# Altium PCB main.PcbDoc (part 12 of 16)
Units mil, origin at the board's own origin, x right, y up, seen from the top; angles counter-clockwise.
Board outline 8394.75 x 5164.44 mil, 7 copper layers (Top Layer 1, Layer 2, Layer 3, Unused, Layer 4_pow, Layer 5_gnd, Bottom 6+gnd), stack 64.043 mil thick; 364 components, 409 nets, 1932 pads, 1061 vias.
Unrouted connection lines stored in the file: 2.
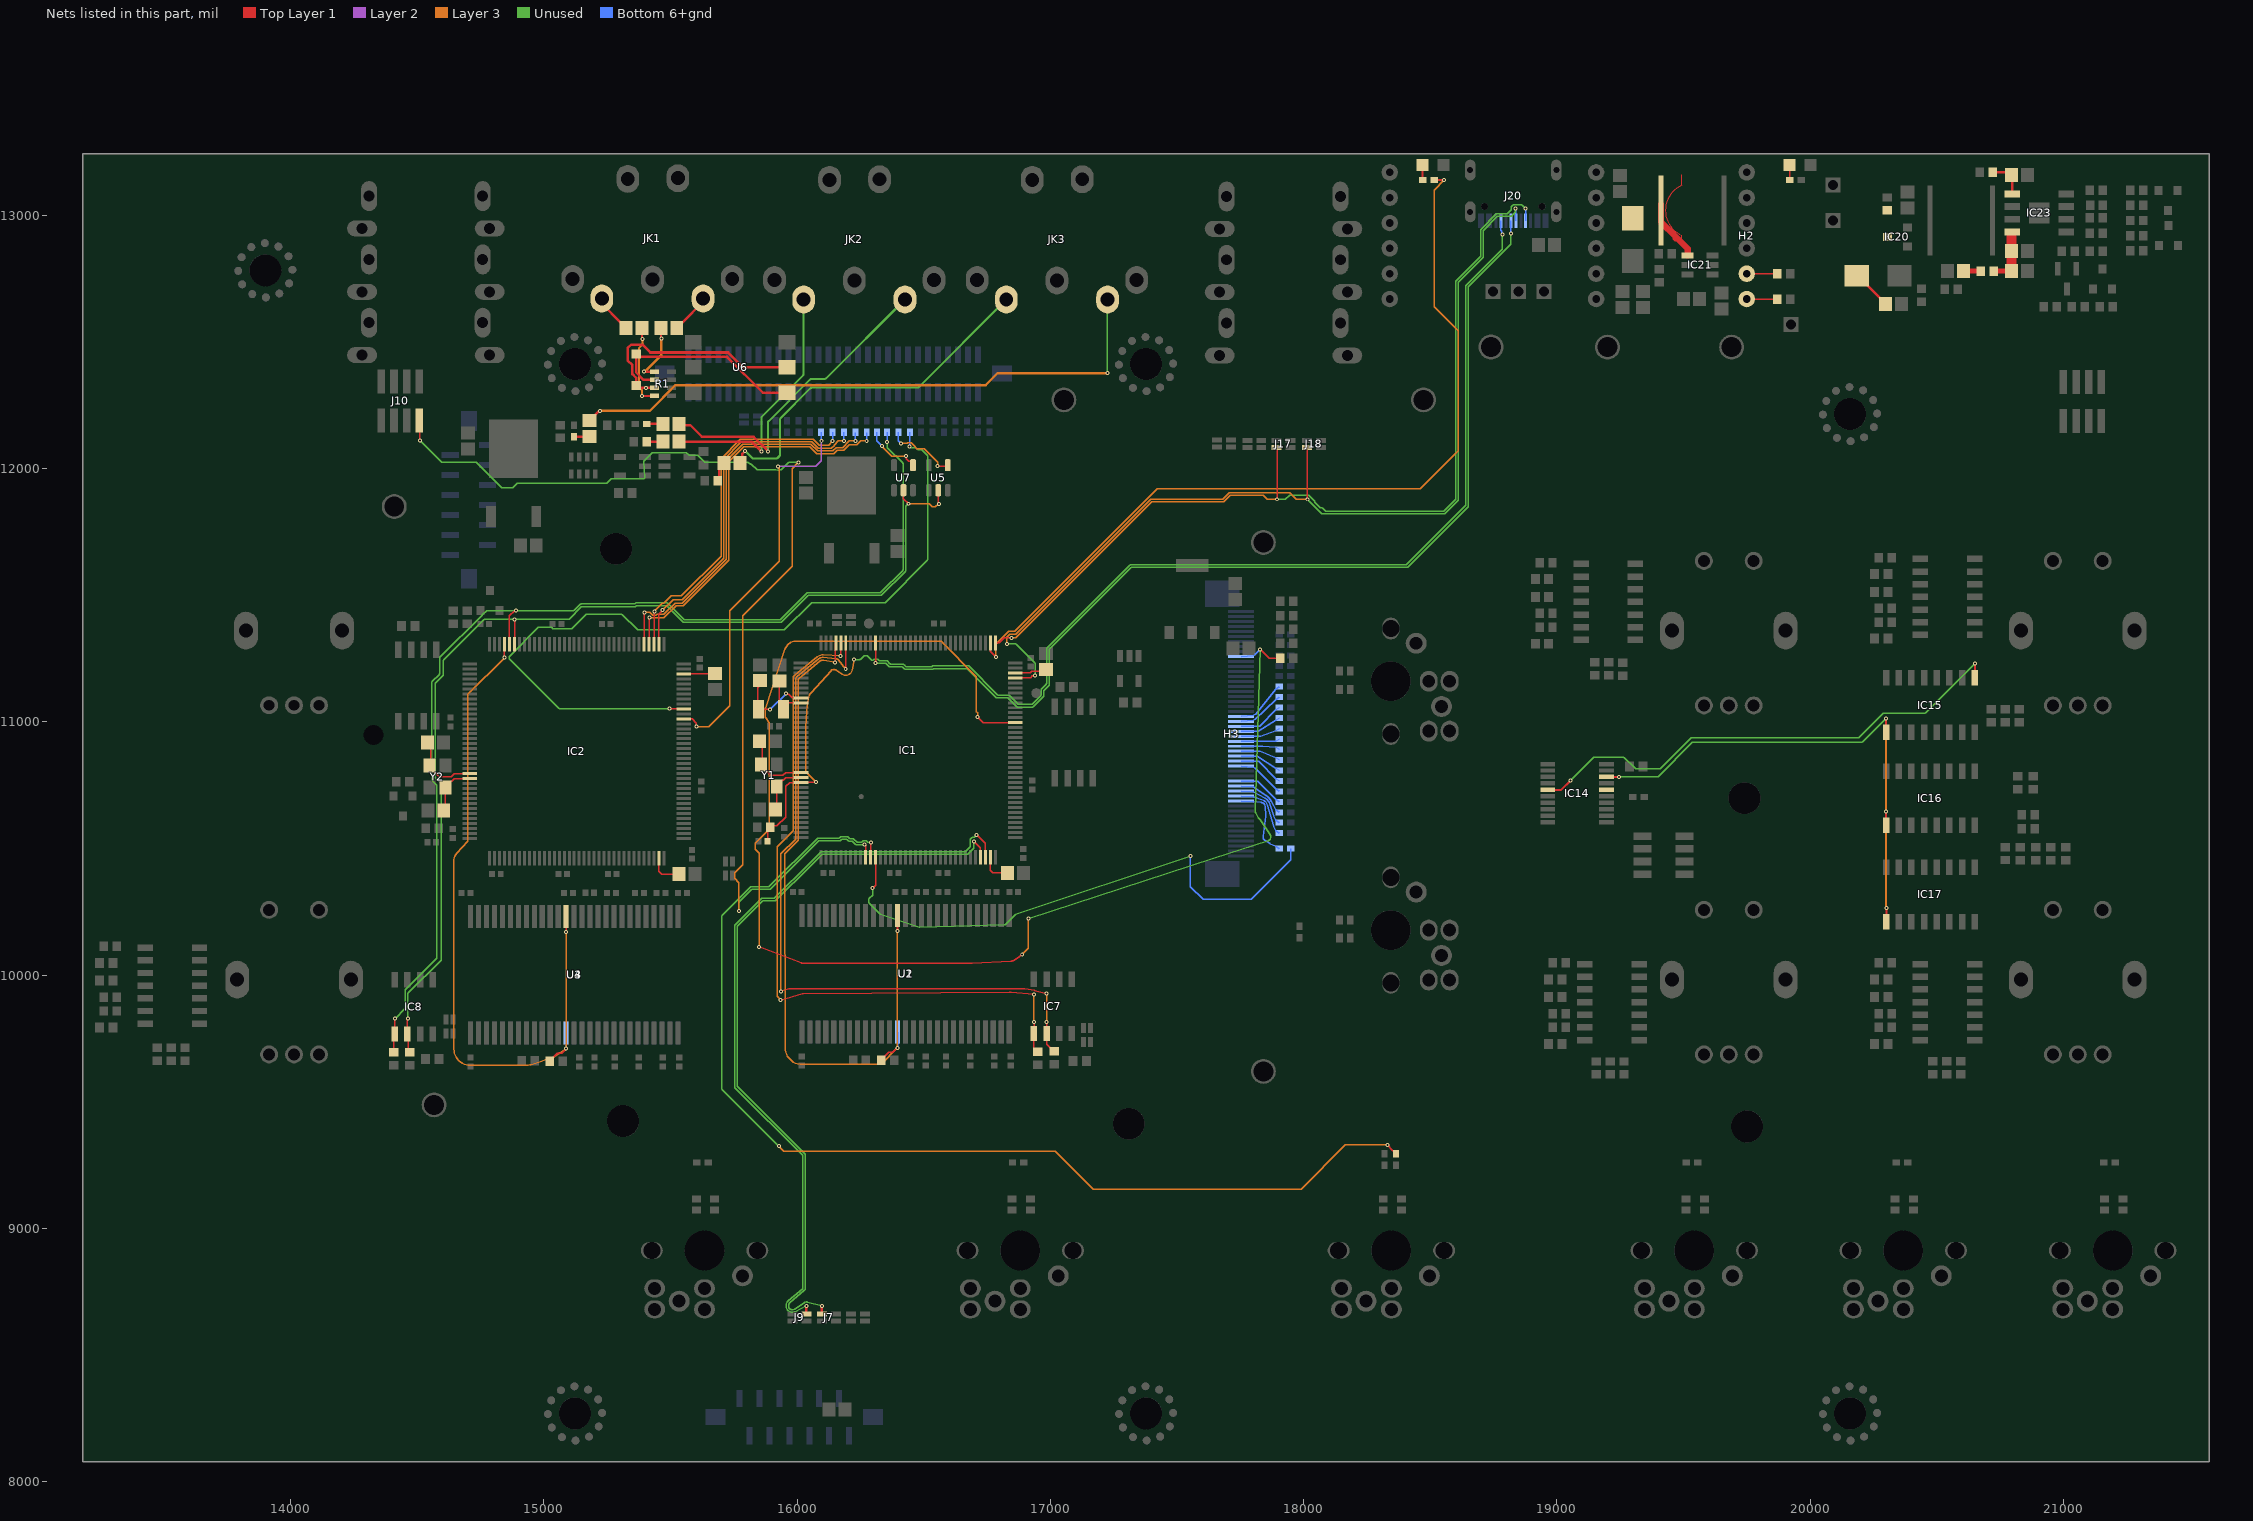
[diagram p15: the nets of this part, all layers, seen from the top]

## Via types
v1: diameter 15.75, hole 7.87, Top Layer 1 to Bottom 6+gnd, tented both sides, 961 vias
v2: diameter 27.56, hole 11.81, Top Layer 1 to Bottom 6+gnd, 45 vias
v3: diameter 23.62/23.62/23.62/23.62/23.62/23.62/23.62 (per signal layer), hole 12, Top Layer 1 to Bottom 6+gnd, tented top, 42 vias
v4: diameter 15.75, hole 7.87, Top Layer 1 to Bottom 6+gnd, 10 vias
v5: diameter 23.62/23.62/23.62/23.62/23.62/23.62/23.62 (per signal layer), hole 12, Top Layer 1 to Bottom 6+gnd, tented bottom, 3 vias

## Nets (pads, with @x,y where several pads share a name; then routed paths per layer and width w, separated by ;. In a path a pad name is that pad's centre, name@x,y a point inside that pad or via, vN(x,y) a via of type N, cw(c..) or ccw(c..) an arc to the next point about the centre after c; other vN are vias at no path point) (continued)
GPIO_GUI.LED2_1: IC1.46 J10.2 | length 4369.6
  Top Layer 1 w5: J10.2@14508.32,12190.6 14510.75,12188.17 v1(14510.75,12112.06) ; v1(16266.92,10515.28) 16266.92,10514.31 16270.83,10510.4 IC1.46@16270.83,10466.06
  Unused w5: v1@14512.72,12108.02 ccw(c14507.72,12108.02) 14511.25,12111.55 v1(14510.75,12112.06) 14597.81,12025 14732.84,12025 14833.21,11924.63 14876.37,11924.63 14895.22,11943.48 15249.32,11943.48 15266.83,11960.99 15393.45,11960.99 ccw(c15394.2,11965.94) 15399.18,11966.32 15394.47,12027.36 cw(c15399.45,12027.76) 15395.9,12031.28 15425.86,12061.24 cw(c15429.38,12057.69) 15429.38,12062.69 15561.14,12062.69 cw(c15561.14,12057.69) 15564.67,12061.23 15571.76,12054.14 ccw(c15575.28,12057.69) 15575.28,12052.69 15606.2,12052.69 cw(c15606.2,12047.69) 15609.72,12051.24 15634.51,12026.45 ccw(c15638.03,12030) 15638.06,12025 15802.85,12025 cw(c15802.85,12020) 15804.96,12024.53 15813.72,12020.44 cw(c15811.6,12015.91) 15814.33,12020.1 15817.89,12017.77 cw(c15815.16,12013.59) 15818.37,12017.41 15843.6,11996.18 ccw(c15846.83,12000) 15846.8,11995 15915.39,11995 cw(c15915.39,11990) 15915.84,11994.98 15923.23,11994.32 ccw(c15924.63,12009.63) 15925.93,11994.31 15934.31,11995.02 ccw(c15933.87,12000) 15935.7,11995.35 ccw(c15930,12009.63) 15939.37,11997.44 ccw(c15936.3,12001.39) 15939.81,11997.83 15965.54,12023.55 cw(c15969.06,12020) 15969.06,12025 v1(16005,12025) ; v1(15769.97,10252.68) cw(c15773.64,10256.08) 15768.64,10256.08 15768.64,10284.7 cw(c15773.64,10284.7) 15770.09,10288.22 15819.42,10337.55 cw(c15822.94,10334) 15822.94,10339 15890.81,10339 ccw(c15890.81,10344) 15894.33,10340.45 16083.37,10529.49 cw(c16086.89,10525.94) 16086.89,10530.94 16168.24,10530.94 ccw(c16168.24,10535.94) 16171.76,10532.39 16174.24,10534.87 cw(c16177.76,10531.31) 16177.76,10536.31 16194.64,10536.31 cw(c16194.64,10531.31) 16198.16,10534.87 16202.38,10530.65 ccw(c16205.88,10534.21) 16205.88,10529.21 16215.85,10529.21 cw(c16215.85,10524.21) 16219.32,10527.82 16222.44,10524.82 cw(c16211.79,10513.73) 16222.7,10524.57 16230.53,10516.73 ccw(c16234.06,10520.28) 16234.06,10515.28 v1(16266.92,10515.28)
  Layer 3 w5: v1(15769.97,10252.68) 15769.97,10365.55 15753.15,10382.37 15753.15,10405 15785,10436.85 15785,11419.29 15980,11614.29 15980,12000 v1(16005,12025)
GPIO_GUI.LED3_1: IC1.47 R3.2 | length 4384.8
  Top Layer 1 w5: IC1.47@16290.51,10466.06 16290.51,10523.36 v1(16291.15,10524) ; v1(18330.28,9330) 18352.74,9307.54 18355.69,9307.54 18365,9298.23 R3.2@18365,9295.28
  Unused w5: v1(15928.15,9325) 15704.6,9548.55 cw(c15708.15,9552.07) 15703.15,9552.07 15703.15,10233.36 cw(c15708.15,10233.36) 15704.6,10236.88 15815.27,10347.55 cw(c15818.79,10344) 15818.79,10349 15886.67,10349 ccw(c15886.67,10354) 15890.19,10350.45 16079.23,10539.49 cw(c16082.75,10535.94) 16082.75,10540.94 16164.1,10540.94 ccw(c16164.1,10545.94) 16167.62,10542.39 16170.1,10544.87 cw(c16173.62,10541.31) 16173.62,10546.31 16198.78,10546.31 cw(c16198.78,10541.31) 16202.3,10544.87 16206.52,10540.65 ccw(c16210.02,10544.21) 16210.02,10539.21 16220,10539.21 cw(c16220,10534.21) 16223.45,10537.82 16226.35,10535.05 cw(c16215.98,10524.21) 16226.54,10534.86 16234.68,10526.73 ccw(c16238.2,10530.28) 16238.2,10525.28 16253.11,10525.28 ccw(c16253.11,10530.28) 16256.63,10526.73 16259.11,10529.2 cw(c16262.63,10525.65) 16262.63,10530.65 16271.22,10530.65 cw(c16271.22,10525.65) 16274.74,10529.2 16278.23,10525.72 ccw(c16281.75,10529.27) 16281.61,10524.27 v1(16291.15,10524)
  Layer 3 w5: v1(15928.15,9325) 15948.15,9305 17020,9305 17170,9155 17990,9155 18165,9330 v1(18330.28,9330)
GUI_NRST: C7.2 IC1.25 J20.A5 R5.2 | length 5563.9
  Top Layer 1 w5: C7.2@15883.15,10528.82 15883.15,10573.23 R5.2@15893.74,10583.82 15900.07,10590.15 15920.21,10590.15 15954.78,10624.73 15954.78,10745.45 15970.2,10760.87 IC1.25@16015.39,10760.87 16016.06,10761.53 16074.57,10761.53 v1(16075.24,10762.2)
  Unused w5: v1(16225.01,11246.58) 16247.26,11246.58 ccw(c16247.26,11251.58) 16250.78,11248.03 16262.75,11260 cw(c16266.27,11256.44) 16266.27,11261.44 16274.69,11261.44 cw(c16274.69,11256.44) 16278.12,11260.08 16281.12,11257.25 cw(c16270.57,11246.07) 16281.4,11256.98 16293.4,11244.98 ccw(c16296.93,11248.52) 16296.93,11243.52 16297.74,11243.52 ccw(c16297.74,11248.52) 16301.26,11244.97 16302.42,11246.13 cw(c16305.94,11242.58) 16305.94,11247.58 16316.75,11247.58 cw(c16316.75,11242.58) 16320.27,11246.13 16322.73,11243.67 ccw(c16326.25,11247.22) 16326.25,11242.22 16352.68,11242.22 cw(c16352.68,11237.22) 16356.2,11240.77 16366.7,11230.27 ccw(c16370.22,11233.82) 16370.22,11228.82 16416.43,11228.82 cw(c16416.43,11223.82) 16419.93,11227.39 16424.17,11223.24 cw(c16413.67,11212.52) 16424.23,11223.18 16427.6,11219.81 ccw(c16431.13,11223.34) 16431.13,11218.34 16530.6,11218.34 ccw(c16530.6,11223.34) 16534.12,11219.79 16535.46,11221.13 cw(c16538.98,11217.58) 16538.98,11222.58 16673.53,11222.58 cw(c16673.53,11217.58) 16677.07,11221.12 16790.54,11107.64 ccw(c16794.05,11111.2) 16794.05,11106.2 16834.91,11106.2 cw(c16834.91,11101.2) 16838.43,11104.75 16872.73,11070.45 ccw(c16876.26,11074) 16876.26,11069 16925.19,11069 ccw(c16925.19,11074) 16928.71,11070.45 16962.48,11104.21 ccw(c16958.92,11107.73) 16963.92,11107.73 16963.92,11128.38 cw(c16968.92,11128.38) 16965.37,11131.9 16983.39,11149.92 ccw(c16979.84,11153.44) 16984.84,11153.44 16984.84,11287.91 cw(c16989.84,11287.91) 16986.29,11291.43 17313.42,11618.55 cw(c17316.94,11615) 17316.94,11620 18402.07,11620 ccw(c18402.07,11625) 18405.59,11621.45 18640,11855.86 18640,12723.14 18783.71,12866.85 ccw(c18780.16,12870.37) 18785.16,12870.37 v1(18785.16,12923.92)
  Layer 3 w5: v1(16075.24,10762.2) 16035.29,10802.15 ; v1(16225.01,11246.58) 16217.02,11204.34 cw(c16192.09,11209.06) 16177.74,11188.13 16154,11204.46 ; 16033.85,10805.66 ccw(c16038.85,10805.66) 16035.29,10802.15 ; 16033.85,10805.66 ccw(c16038.85,10805.66) 16035.29,10802.15 ; 16033.85,10805.66 ccw(c16038.85,10805.66) 16035.29,10802.15 ; 16033.85,10805.66 ccw(c16038.85,10805.66) 16035.29,10802.15 ; 16033.85,10805.66 ccw(c16038.85,10805.66) 16035.29,10802.15 ; 16033.85,10805.66 ccw(c16038.85,10805.66) 16035.29,10802.15 ; 16033.85,10805.66 ccw(c16038.85,10805.66) 16035.29,10802.15 ; 16033.85,10805.66 ccw(c16038.85,10805.66) 16035.29,10802.15 ; 16033.85,10805.66 ccw(c16038.85,10805.66) 16035.29,10802.15 ; 16033.85,10805.66 ccw(c16038.85,10805.66) 16035.29,10802.15 ; 16033.85,10805.66 ccw(c16038.85,10805.66) 16035.29,10802.15 ; 16033.85,10805.66 ccw(c16038.85,10805.66) 16035.29,10802.15 ; 16033.85,10805.66 ccw(c16038.85,10805.66) 16035.29,10802.15 ; 16033.85,10805.66 ccw(c16038.85,10805.66) 16035.29,10802.15 ; 16033.85,10805.66 ccw(c16038.85,10805.66) 16035.29,10802.15 ; 16033.85,10805.66 ccw(c16038.85,10805.66) 16035.29,10802.15 ; 16033.85,10805.66 16033.83,10978.64 cw(c16079.21,10978.64) 16033.94,10981.78 16038.1,11041.91 ; 16038.1,11041.91 cw(c16093.35,11038.08) 16038.39,11044.84 ; 16038.1,11041.91 cw(c16093.35,11038.08) 16038.39,11044.84 ; 16038.1,11041.91 cw(c16093.35,11038.08) 16038.39,11044.84 ; 16038.1,11041.91 cw(c16093.35,11038.08) 16038.39,11044.84 ; 16038.1,11041.91 cw(c16093.35,11038.08) 16038.39,11044.84 ; 16038.1,11041.91 cw(c16093.35,11038.08) 16038.39,11044.84 ; 16038.1,11041.91 cw(c16093.35,11038.08) 16038.39,11044.84 ; 16038.1,11041.91 cw(c16093.35,11038.08) 16038.39,11044.84 ; 16038.1,11041.91 cw(c16093.35,11038.08) 16038.39,11044.84 ; 16038.1,11041.91 cw(c16093.35,11038.08) 16038.39,11044.84 ; 16038.1,11041.91 cw(c16093.35,11038.08) 16038.39,11044.84 ; 16038.1,11041.91 cw(c16093.35,11038.08) 16038.39,11044.84 ; 16038.1,11041.91 cw(c16093.35,11038.08) 16038.39,11044.84 ; 16038.1,11041.91 cw(c16093.35,11038.08) 16038.39,11044.84 ; 16038.1,11041.91 cw(c16093.35,11038.08) 16038.39,11044.84 ; 16038.1,11041.91 cw(c16093.35,11038.08) 16038.39,11044.84 ; 16038.39,11044.84 16044.13,11091.28 cw(c16089.16,11085.73) 16055.62,11116.29 16133.87,11202.18 ; 16133.87,11202.18 cw(c16145.24,11191.83) 16154,11204.46 ; 16133.87,11202.18 cw(c16145.24,11191.83) 16154,11204.46 ; 16133.87,11202.18 cw(c16145.24,11191.83) 16154,11204.46 ; 16133.87,11202.18 cw(c16145.24,11191.83) 16154,11204.46 ; 16133.87,11202.18 cw(c16145.24,11191.83) 16154,11204.46 ; 16133.87,11202.18 cw(c16145.24,11191.83) 16154,11204.46 ; 16133.87,11202.18 cw(c16145.24,11191.83) 16154,11204.46 ; 16133.87,11202.18 cw(c16145.24,11191.83) 16154,11204.46 ; 16133.87,11202.18 cw(c16145.24,11191.83) 16154,11204.46 ; 16133.87,11202.18 cw(c16145.24,11191.83) 16154,11204.46 ; 16133.87,11202.18 cw(c16145.24,11191.83) 16154,11204.46 ; 16133.87,11202.18 cw(c16145.24,11191.83) 16154,11204.46 ; 16133.87,11202.18 cw(c16145.24,11191.83) 16154,11204.46 ; 16133.87,11202.18 cw(c16145.24,11191.83) 16154,11204.46 ; 16133.87,11202.18 cw(c16145.24,11191.83) 16154,11204.46 ; 16133.87,11202.18 cw(c16145.24,11191.83) 16154,11204.46
  Bottom 6+gnd w5: J20.A5@18778.6,12978.4 18778.6,12941.8 18783.11,12937.29 18783.11,12925.98 v1(18785.16,12923.92)
GUI_SWD.CLK_1: IC1.109 J17.1 J20.A8 | length 3708.1
  Top Layer 1 w5: IC1.109@16782.64,11311.57 16783.27,11312.2 16798.85,11312.2 16818.55,11331.91 v1(16846.8,11331.91) ; J17.1@17892.56,12083.86 17895,12081.42 v1(17895,11879.38)
  Unused w5: v1(17895,11879.38) 17926.31,11879.38 ccw(c17926.31,11884.38) 17929.82,11880.83 17942.3,11893.31 cw(c17945.82,11889.76) 17945.82,11894.76 18019.3,11894.76 cw(c18019.3,11889.76) 18022.82,11893.31 18042.37,11873.75 cw(c18038.82,11870.23) 18043.82,11870.23 18043.82,11869.53 ccw(c18048.82,11869.53) 18045.27,11866.01 18064.83,11846.45 ccw(c18068.35,11850) 18068.35,11845 18072.8,11845 cw(c18072.8,11840) 18076.32,11843.56 18087.29,11832.71 ccw(c18090.81,11836.26) 18090.81,11831.26 18549.24,11831.26 ccw(c18549.24,11836.26) 18552.76,11832.71 18600,11879.94 18600,12739.71 18697.94,12837.65 ccw(c18694.39,12841.17) 18699.39,12841.17 18699.39,12942.67 cw(c18704.39,12942.67) 18700.84,12946.19 18760.53,13005.88 cw(c18764.05,13002.33) 18764.05,13007.33 18803.19,13007.33 ccw(c18803.19,13012.33) 18806.71,13008.78 18817.73,13019.8 ccw(c18814.18,13023.32) 18819.18,13023.32 18819.18,13031.19 cw(c18824.18,13031.19) 18820.63,13034.71 18826.6,13040.68 cw(c18830.12,13037.13) 18830.12,13042.13 18859.14,13042.13 cw(c18859.14,13037.13) 18862.68,13040.66 v1(18876.59,13026.75)
  Layer 3 w5: v1(16846.8,11331.91) 16862.51,11331.91 17400.23,11869.63 17685.51,11869.63 17711.26,11895.37 17840.87,11895.37 17856.86,11879.38 v1(17895,11879.38)
  Bottom 6+gnd w5: J20.A8@18877.02,12978.4 v1@18877.02,13026.32
GUI_SWD.IO_1: IC1.105 J18.1 J20.A7 | length 3904.6
  Top Layer 1 w5: IC1.105@16860.91,11174.25 16861.02,11174.37 16921.6,11174.37 16929.31,11182.08 16937.5,11182.08 v1(16939.55,11184.13) ; J18.1@18012.56,12083.86 18015,12081.42 v1(18015,11879.38)
  Unused w5: v1(16828.52,11308.31) 16862.06,11308.31 cw(c16862.06,11303.31) 16865.58,11306.86 16938.11,11234.34 cw(c16934.55,11230.82) 16939.55,11230.82 v1(16939.55,11184.13) ; v1(18015,11879.38) 18071.67,11822.71 ccw(c18075.19,11826.26) 18075.19,11821.26 18553.39,11821.26 ccw(c18553.39,11826.26) 18556.91,11822.71 18610,11875.8 18610,12735.57 18707.94,12833.51 ccw(c18704.39,12837.03) 18709.39,12837.03 18709.39,12938.53 cw(c18714.39,12938.53) 18710.84,12942.05 18764.67,12995.88 cw(c18768.19,12992.33) 18768.19,12997.33 18818.55,12997.33 ccw(c18818.55,13002.33) 18822.07,12998.78 18835.16,13011.87 18835.16,13024.7 v1(18837.22,13026.75)
  Layer 3 w5: v1(16828.52,11308.31) 16828.44,11308.39 16828.44,11335.29 16840.43,11347.28 16863.74,11347.28 17396.08,11879.63 17681.37,11879.63 17707.12,11905.37 17945.87,11905.37 17971.86,11879.38 v1(18015,11879.38)
  Bottom 6+gnd w5: J20.A7@18837.65,12978.4 v1@18837.65,13026.32
GUI_SWD.SWO_1: IC1.133 J20.A6 | length 4111.2
  Top Layer 1 w5: v1(16310.24,11232.2) IC1.133@16310.2,11311.57
  Unused w5: v1(16310.24,11232.2) 16348.41,11232.2 cw(c16348.41,11227.2) 16351.93,11230.76 16363.85,11218.97 ccw(c16367.38,11222.52) 16367.38,11217.52 16413.59,11217.52 cw(c16413.59,11212.52) 16417.1,11216.08 16423.49,11209.77 ccw(c16426.99,11213.34) 16426.99,11208.34 16535.6,11208.34 ccw(c16535.6,11213.34) 16538.98,11209.66 16539.14,11209.8 cw(c16542.52,11206.12) 16542.52,11211.12 16668.78,11211.12 cw(c16668.78,11206.12) 16672.32,11209.65 16785.79,11096.18 ccw(c16789.3,11099.74) 16789.3,11094.74 16830.16,11094.74 cw(c16830.16,11089.74) 16833.68,11093.29 16866.52,11060.45 ccw(c16870.04,11064) 16870.04,11059 16929.33,11059 ccw(c16929.33,11064) 16932.85,11060.45 16972.48,11100.07 ccw(c16968.92,11103.59) 16973.92,11103.59 16973.92,11122.17 cw(c16978.92,11122.17) 16975.37,11125.69 16994.86,11145.17 ccw(c16991.31,11148.69) 16996.31,11148.69 16996.31,11285.23 cw(c17001.31,11285.23) 16997.76,11288.75 17317.56,11608.55 cw(c17321.08,11605) 17321.08,11610 18408.28,11610 ccw(c18408.28,11615) 18411.8,11611.45 18650,11849.64 18650,12719 18816.95,12885.95 ccw(c18813.4,12889.47) 18818.4,12889.47 v1(18818.4,12928.05)
  Bottom 6+gnd w5: J20.A6@18817.97,12978.4 18818.18,12978.19 18818.18,12928.27 v1(18818.4,12928.05)
I2C1_SCL: IC2.139 IC8.6 R15.1 U5.2 U7.2 | length 4269.9
  Top Layer 1 w5: v1(14463.15,9828.82) 14461.48,9827.15 IC8.6@14461.48,9768.49 14465.24,9764.73 14465.24,9701.51 R15.1@14471.48,9695.26 ; IC2.139@14883.85,11307.38 14885,11308.54 v1(14885,11405) ; U7.2@16420,11915 16420,11881.64 v1(16440,11861.64) ; U5.2@16557.4,11915 16557.4,11865.51 16560,11862.91 v1(16560,11860)
  Unused w5: v1(14463.15,9828.82) 14463.15,9926.75 cw(c14468.15,9926.75) 14464.6,9930.27 14594.38,10060.05 ccw(c14590.83,10063.57) 14595.83,10063.57 14595.83,10754.07 ccw(c14590.83,10754.07) 14594.36,10757.61 14572.09,10779.88 cw(c14575.65,10783.39) 14570.65,10783.39 14570.65,11149.25 cw(c14575.65,11149.25) 14572.1,11152.77 14601.7,11182.37 ccw(c14598.15,11185.89) 14603.15,11185.89 14603.15,11241.75 cw(c14608.15,11241.75) 14604.6,11245.27 14762.88,11403.55 cw(c14766.4,11400) 14766.4,11405 15096.08,11405 ccw(c15096.08,11410) 15099.6,11406.45 15147.56,11454.41 cw(c15151.08,11450.86) 15151.08,11455.86 15361.08,11455.86 ccw(c15361.08,11460.86) 15364.6,11457.31 15365.48,11458.19 cw(c15369,11454.64) 15369,11459.64 15481.44,11459.64 cw(c15481.44,11454.64) 15484.96,11458.19 15547.88,11395.27 ccw(c15551.4,11398.82) 15551.4,11393.82 15935.76,11393.82 ccw(c15935.76,11398.82) 15939.28,11395.27 16042.56,11498.55 cw(c16046.08,11495) 16046.08,11500 16331.36,11500 ccw(c16331.36,11505) 16334.88,11501.45 16426.91,11593.47 ccw(c16423.36,11596.99) 16428.36,11596.99 16428.36,11847.93 cw(c16433.36,11847.93) 16429.81,11851.45 v1(16440,11861.64)
  Layer 3 w5: v1(16440,11861.64) 16521.62,11861.64 16533.63,11849.63 16546.37,11849.63 16556.74,11860 v1(16560,11860)
I2C1_SCL1_9: R149.1 U5.4 | length 284.3
  Top Layer 1 w5: v1(16555,12010) 16590.98,12010 U5.4@16594.8,12013.82
  Layer 3 w5: v1(16410,12100) 16435.58,12100 16437.76,12102.17 16450.49,12102.17 16461.71,12090.96 16461.71,12090.41 16472.92,12079.19 16502.27,12079.19 16555,12026.46 v1(16555,12010)
  Bottom 6+gnd w5: R149.1@16400,12144.72 16400,12110 v1(16410,12100)
I2C1_SCL2_9: R151.1 U7.4 | length 227.9
  Top Layer 1 w5: v1(16430,12050) 16431.48,12048.52 16431.48,12039.74 16441.22,12030 16448.54,12030 16457.4,12021.14 U7.4@16457.4,12013.82
  Layer 3 w5: v1(16334.4,12089.55) 16373.95,12050 v1(16430,12050)
  Bottom 6+gnd w5: R151.1@16315,12144.72 16315,12110 16334.4,12090.6 v1(16334.4,12089.55) v1@16335,12088.95
I2C1_SCL_6: IC1.139 IC7.6 R13.1 | length 3306
  Top Layer 1 w5: v1(15936.32,9936.49) 15967.09,9946.7 ; v1(16192.09,11209.05) IC1.139@16192.09,11311.57 ; v1(16985.24,9927.2) 16939.07,9939.52 ; v1(16985.28,9815.69) 16985.28,9770.48 IC7.6@16985.24,9770.43 16985.24,9727.64 17013.27,9699.61 R13.1@17015.24,9699.61 ; 15967.09,9946.7 cw(c15970.24,9937.2) 15970.24,9947.2 ; 15967.09,9946.7 cw(c15970.24,9937.2) 15970.24,9947.2 ; 15967.09,9946.7 cw(c15970.24,9937.2) 15970.24,9947.2 ; 15967.09,9946.7 cw(c15970.24,9937.2) 15970.24,9947.2 ; 15967.09,9946.7 cw(c15970.24,9937.2) 15970.24,9947.2 ; 15967.09,9946.7 cw(c15970.24,9937.2) 15970.24,9947.2 ; 15967.09,9946.7 cw(c15970.24,9937.2) 15970.24,9947.2 ; 15967.09,9946.7 cw(c15970.24,9937.2) 15970.24,9947.2 ; 15967.09,9946.7 cw(c15970.24,9937.2) 15970.24,9947.2 ; 15967.09,9946.7 cw(c15970.24,9937.2) 15970.24,9947.2 ; 15967.09,9946.7 cw(c15970.24,9937.2) 15970.24,9947.2 ; 15967.09,9946.7 cw(c15970.24,9937.2) 15970.24,9947.2 ; 15967.09,9946.7 cw(c15970.24,9937.2) 15970.24,9947.2 ; 15967.09,9946.7 cw(c15970.24,9937.2) 15970.24,9947.2 ; 15967.09,9946.7 cw(c15970.24,9937.2) 15970.24,9947.2 ; 15967.09,9946.7 cw(c15970.24,9937.2) 15970.24,9947.2 ; 15970.24,9947.2 16897.96,9947.2 ; 16897.96,9947.2 cw(c16897.96,9937.2) 16899.83,9947.03 ; 16897.96,9947.2 cw(c16897.96,9937.2) 16899.83,9947.03 ; 16897.96,9947.2 cw(c16897.96,9937.2) 16899.83,9947.03 ; 16897.96,9947.2 cw(c16897.96,9937.2) 16899.83,9947.03 ; 16897.96,9947.2 cw(c16897.96,9937.2) 16899.83,9947.03 ; 16897.96,9947.2 cw(c16897.96,9937.2) 16899.83,9947.03 ; 16897.96,9947.2 cw(c16897.96,9937.2) 16899.83,9947.03 ; 16897.96,9947.2 cw(c16897.96,9937.2) 16899.83,9947.03 ; 16897.96,9947.2 cw(c16897.96,9937.2) 16899.83,9947.03 ; 16897.96,9947.2 cw(c16897.96,9937.2) 16899.83,9947.03 ; 16897.96,9947.2 cw(c16897.96,9937.2) 16899.83,9947.03 ; 16897.96,9947.2 cw(c16897.96,9937.2) 16899.83,9947.03 ; 16897.96,9947.2 cw(c16897.96,9937.2) 16899.83,9947.03 ; 16897.96,9947.2 cw(c16897.96,9937.2) 16899.83,9947.03 ; 16897.96,9947.2 cw(c16897.96,9937.2) 16899.83,9947.03 ; 16897.96,9947.2 cw(c16897.96,9937.2) 16899.83,9947.03 ; 16899.83,9947.03 16937.98,9939.77 ; 16937.98,9939.77 cw(c16935.11,9924.67) 16939.07,9939.52 ; 16937.98,9939.77 cw(c16935.11,9924.67) 16939.07,9939.52 ; 16937.98,9939.77 cw(c16935.11,9924.67) 16939.07,9939.52 ; 16937.98,9939.77 cw(c16935.11,9924.67) 16939.07,9939.52 ; 16937.98,9939.77 cw(c16935.11,9924.67) 16939.07,9939.52 ; 16937.98,9939.77 cw(c16935.11,9924.67) 16939.07,9939.52 ; 16937.98,9939.77 cw(c16935.11,9924.67) 16939.07,9939.52 ; 16937.98,9939.77 cw(c16935.11,9924.67) 16939.07,9939.52 ; 16937.98,9939.77 cw(c16935.11,9924.67) 16939.07,9939.52 ; 16937.98,9939.77 cw(c16935.11,9924.67) 16939.07,9939.52 ; 16937.98,9939.77 cw(c16935.11,9924.67) 16939.07,9939.52 ; 16937.98,9939.77 cw(c16935.11,9924.67) 16939.07,9939.52 ; 16937.98,9939.77 cw(c16935.11,9924.67) 16939.07,9939.52 ; 16937.98,9939.77 cw(c16935.11,9924.67) 16939.07,9939.52 ; 16937.98,9939.77 cw(c16935.11,9924.67) 16939.07,9939.52 ; 16937.98,9939.77 cw(c16935.11,9924.67) 16939.07,9939.52
  Layer 3 w5: v1(15936.32,9936.49) 15936.32,10479.8 15993.83,10537.31 15993.83,11170.85 ; v1(16192.09,11209.05) 16162.25,11244.93 ccw(c16150.43,11235.1) 16151.76,11250.41 16103.59,11254.6 ; v1(16985.28,9815.69) v1@16985.26,9927.18 ; 15993.83,11170.85 cw(c15998.83,11170.85) 15995.28,11174.37 15998.26,11177.35 cw(c16008.83,11166.71) 15999.33,11178.32 16085.28,11248.93 ; 15993.83,11170.85 cw(c15998.83,11170.85) 15995.27,11174.36 ; 15993.83,11170.85 cw(c15998.83,11170.85) 15995.27,11174.36 ; 15993.83,11170.85 cw(c15998.83,11170.85) 15995.27,11174.36 ; 15993.83,11170.85 cw(c15998.83,11170.85) 15995.27,11174.36 ; 16085.28,11248.93 cw(c16101.39,11229.33) 16103.59,11254.61 ; 16085.28,11248.93 cw(c16101.39,11229.33) 16103.59,11254.61 ; 16085.28,11248.93 cw(c16101.39,11229.33) 16103.59,11254.61 ; 16085.28,11248.93 cw(c16101.39,11229.33) 16103.59,11254.61 ; 16085.28,11248.93 cw(c16101.39,11229.33) 16103.59,11254.61 ; 16085.28,11248.93 cw(c16101.39,11229.33) 16103.59,11254.61 ; 16085.28,11248.93 cw(c16101.39,11229.33) 16103.59,11254.61 ; 16085.28,11248.93 cw(c16101.39,11229.33) 16103.59,11254.61 ; 16085.28,11248.93 cw(c16101.39,11229.33) 16103.59,11254.61 ; 16085.28,11248.93 cw(c16101.39,11229.33) 16103.59,11254.61 ; 16085.28,11248.93 cw(c16101.39,11229.33) 16103.59,11254.61 ; 16085.28,11248.93 cw(c16101.39,11229.33) 16103.59,11254.61 ; 16085.28,11248.93 cw(c16101.39,11229.33) 16103.59,11254.61 ; 16085.28,11248.93 cw(c16101.39,11229.33) 16103.59,11254.61 ; 16085.28,11248.93 cw(c16101.39,11229.33) 16103.59,11254.61 ; 16085.28,11248.93 cw(c16101.39,11229.33) 16103.59,11254.61
I2C1_SDA: IC2.140 IC8.5 R16.1 R150.1 | length 4391.9
  Top Layer 1 w5: R16.1@14406.48,9695.26 14406.48,9763.49 IC8.5@14411.48,9768.49 14411.48,9827.15 v1(14413.15,9828.82) ; IC2.140@14864.16,11307.38 14864.16,11419.83 14884.33,11440 v1(14890,11440)
  Unused w5: v1(14413.15,9828.82) 14451.7,9867.37 ccw(c14448.15,9870.89) 14453.15,9870.89 14453.15,9941.75 cw(c14458.15,9941.75) 14454.6,9945.27 14576.7,10067.37 ccw(c14573.15,10070.89) 14578.15,10070.89 14578.15,10746.75 ccw(c14573.15,10746.75) 14576.69,10750.28 14559.59,10767.38 cw(c14563.15,10770.89) 14558.15,10770.89 14558.15,11156.75 cw(c14563.15,11156.75) 14559.6,11160.27 14586.7,11187.37 ccw(c14583.15,11190.89) 14588.15,11190.83 14588.52,11223.64 ccw(c14573.15,11223.82) 14588.51,11224.56 14588.15,11231.87 cw(c14593.15,11232.08) 14588.15,11232.05 14588.15,11251.75 cw(c14593.15,11251.75) 14589.6,11255.27 14756.69,11422.35 cw(c14760.2,11418.8) 14756.86,11422.52 14775.11,11438.74 cw(c14778.43,11435) 14778.43,11440 15116.94,11440 ccw(c15116.94,11445) 15120.47,11441.46 15143.42,11464.41 cw(c15146.94,11460.86) 15146.94,11465.86 15356.94,11465.86 ccw(c15356.94,11470.86) 15360.46,11467.31 15361.7,11468.55 cw(c15365.22,11465) 15365.22,11470 15485.73,11470 cw(c15485.73,11465) 15489.25,11468.55 15552.53,11405.27 ccw(c15556.06,11408.82) 15556.06,11403.82 15931.61,11403.82 ccw(c15931.61,11408.82) 15935.13,11405.27 16038.78,11508.91 cw(c16042.3,11505.36) 16042.3,11510.36 16327.58,11510.36 ccw(c16327.58,11515.36) 16331.1,11511.81 16416.91,11597.62 ccw(c16413.36,11601.14) 16418.36,11601.14 16418.36,12019.57 ccw(c16413.36,12019.57) 16416.89,12023.11 16356.44,12083.56 cw(c16360,12087.07) 16355,12087.07 v1(16355,12105)
  Bottom 6+gnd w5: v1(16355,12105) R150.1@16355,12144.72
I2C1_SDA_6: IC1.140 IC7.5 R14.1 | length 3074
  Top Layer 1 w5: v1(15935.24,9902.2) 16020.97,9926.97 ; v1(16172,11260.7) 16172.2,11260.9 16172.2,11311.38 IC1.140@16172.4,11311.57 ; v1(16935.11,9924.67) 16846.41,9932.66 ; v1(16935.63,9815.65) 16935.63,9770.83 IC7.5@16935.24,9770.43 16935.24,9712.62 16949.47,9698.38 R14.1@16950.24,9698.38 ; 16020.97,9926.97 cw(c16025.24,9912.2) 16025.13,9927.58 ; 16020.97,9926.97 cw(c16025.24,9912.2) 16025.13,9927.58 ; 16020.97,9926.97 cw(c16025.24,9912.2) 16025.13,9927.58 ; 16020.97,9926.97 cw(c16025.24,9912.2) 16025.13,9927.58 ; 16020.97,9926.97 cw(c16025.24,9912.2) 16025.13,9927.58 ; 16020.97,9926.97 cw(c16025.24,9912.2) 16025.13,9927.58 ; 16020.97,9926.97 cw(c16025.24,9912.2) 16025.13,9927.58 ; 16020.97,9926.97 cw(c16025.24,9912.2) 16025.13,9927.58 ; 16020.97,9926.97 cw(c16025.24,9912.2) 16025.13,9927.58 ; 16020.97,9926.97 cw(c16025.24,9912.2) 16025.13,9927.58 ; 16020.97,9926.97 cw(c16025.24,9912.2) 16025.13,9927.58 ; 16020.97,9926.97 cw(c16025.24,9912.2) 16025.13,9927.58 ; 16020.97,9926.97 cw(c16025.24,9912.2) 16025.13,9927.58 ; 16020.97,9926.97 cw(c16025.24,9912.2) 16025.13,9927.58 ; 16020.97,9926.97 cw(c16025.24,9912.2) 16025.13,9927.58 ; 16020.97,9926.97 cw(c16025.24,9912.2) 16025.13,9927.58 ; 16025.13,9927.58 16837.2,9933.05 ; 16837.2,9933.05 cw(c16837.84,9837.68) 16846.41,9932.67 ; 16837.2,9933.05 cw(c16837.84,9837.68) 16846.41,9932.67 ; 16837.2,9933.05 cw(c16837.84,9837.68) 16846.41,9932.67 ; 16837.2,9933.05 cw(c16837.84,9837.68) 16846.41,9932.67 ; 16837.2,9933.05 cw(c16837.84,9837.68) 16846.41,9932.67 ; 16837.2,9933.05 cw(c16837.84,9837.68) 16846.41,9932.67 ; 16837.2,9933.05 cw(c16837.84,9837.68) 16846.41,9932.67 ; 16837.2,9933.05 cw(c16837.84,9837.68) 16846.41,9932.67 ; 16837.2,9933.05 cw(c16837.84,9837.68) 16846.41,9932.67 ; 16837.2,9933.05 cw(c16837.84,9837.68) 16846.41,9932.67 ; 16837.2,9933.05 cw(c16837.84,9837.68) 16846.41,9932.67 ; 16837.2,9933.05 cw(c16837.84,9837.68) 16846.41,9932.67 ; 16837.2,9933.05 cw(c16837.84,9837.68) 16846.41,9932.67 ; 16837.2,9933.05 cw(c16837.84,9837.68) 16846.41,9932.67 ; 16837.2,9933.05 cw(c16837.84,9837.68) 16846.41,9932.67 ; 16837.2,9933.05 cw(c16837.84,9837.68) 16846.41,9932.67
  Layer 3 w5: v1(15935.24,9902.2) 15920.95,9916.49 15920.95,10507.91 15983.83,10570.8 15983.83,11175 ; v1(16172,11260.7) 16103.42,11264.64 ccw(c16101.39,11229.33) 16078.94,11256.67 15992.96,11186.03 ccw(c16008.83,11166.71) 15991.21,11184.44 15985.28,11178.51 ; v1(16935.11,9924.67) 16935.37,9924.41 16935.37,9815.91 v1(16935.63,9815.65) ; 15983.83,11175 cw(c15988.83,11175) 15985.28,11178.51 ; 15983.83,11175 cw(c15988.83,11175) 15985.28,11178.51 ; 15983.83,11175 cw(c15988.83,11175) 15985.28,11178.51 ; 15983.83,11175 cw(c15988.83,11175) 15985.28,11178.51 ; 15983.83,11175 cw(c15988.83,11175) 15985.28,11178.51 ; 15983.83,11175 cw(c15988.83,11175) 15985.28,11178.51 ; 15983.83,11175 cw(c15988.83,11175) 15985.28,11178.51 ; 15983.83,11175 cw(c15988.83,11175) 15985.28,11178.51 ; 15983.83,11175 cw(c15988.83,11175) 15985.28,11178.51 ; 15983.83,11175 cw(c15988.83,11175) 15985.28,11178.51 ; 15983.83,11175 cw(c15988.83,11175) 15985.28,11178.51 ; 15983.83,11175 cw(c15988.83,11175) 15985.28,11178.51 ; 15983.83,11175 cw(c15988.83,11175) 15985.28,11178.51 ; 15983.83,11175 cw(c15988.83,11175) 15985.28,11178.51 ; 15983.83,11175 cw(c15988.83,11175) 15985.28,11178.51 ; 15983.83,11175 cw(c15988.83,11175) 15985.28,11178.51
I2C2_SCL: IC1.69 J7.2 | length 2982.6
  Top Layer 1 w5: v1(16698.15,10528.82) 16723.58,10503.38 IC1.69@16723.58,10466.06
  Top Layer 1 w10: J7.2@16098.03,8662.6 v1@16098.03,8694.34
  Unused w5: v1(16097.8,8694.57) 16040.59,8709.56 ccw(c16036.7,8694.69) 16028.11,8707.44 15990.15,8681.93 cw(c15981.58,8694.69) 15971.5,8706.3 16027.97,8755.31 ccw(c16018.15,8766.65) 16028.76,8756.04 16031.68,8758.97 ccw(c16028.15,8762.5) 16033.15,8762.5 16033.15,9290.18 ccw(c16028.15,9290.18) 16031.7,9293.7 15764.6,9560.8 cw(c15768.15,9564.32) 15763.15,9564.32 15763.15,10190.46 cw(c15768.15,10190.46) 15764.6,10193.98 15862.99,10292.37 cw(c15866.51,10288.82) 15866.51,10293.82 15913.11,10293.82 ccw(c15913.11,10298.82) 15916.63,10295.27 16053.56,10432.19 16090.02,10468.45 cw(c16111.18,10447.17) 16090.08,10468.51 16097.2,10475.58 cw(c16100.72,10472.03) 16097.24,10475.62 16097.4,10475.77 cw(c16100.87,10472.17) 16100.87,10477.17 16669.94,10477.17 ccw(c16669.94,10482.17) 16673.46,10478.62 16696.7,10501.86 ccw(c16693.15,10505.38) 16698.15,10505.38 v1(16698.15,10528.82)
I2C2_SDA: IC1.70 J9.2 | length 2996.5
  Top Layer 1 w5: v1(16708.15,10553.82) 16710.19,10553.82 16743.27,10520.74 IC1.70@16743.27,10466.06
  Top Layer 1 w10: J9.2@16036.93,8662.72 v1@16036.93,8694.46
  Unused w5: v1(16036.7,8694.69) 15993.26,8672.16 cw(c15981.58,8694.69) 15964.95,8713.85 16021.43,8762.87 ccw(c16018.15,8766.65) 16023.15,8766.65 16023.15,9286.04 ccw(c16018.15,9286.04) 16021.7,9289.56 15754.6,9556.66 cw(c15758.15,9560.18) 15753.15,9560.18 15753.15,10194.6 cw(c15758.15,10194.6) 15754.6,10198.12 15858.84,10302.37 cw(c15862.36,10298.82) 15862.36,10303.82 15908.97,10303.82 ccw(c15908.97,10308.82) 15912.49,10305.27 16052.33,10445.1 16088.79,10481.36 cw(c16102.89,10467.17) 16088.83,10481.4 16093.21,10485.73 cw(c16096.73,10482.17) 16096.73,10487.17 16661.97,10487.17 ccw(c16661.97,10492.17) 16665.49,10488.62 16681.33,10504.45 ccw(c16677.78,10507.97) 16682.78,10507.97 16682.78,10533.12 cw(c16687.78,10533.12) 16684.22,10536.64 16690.33,10542.74 cw(c16693.85,10539.19) 16693.85,10544.19 16696.45,10544.19 ccw(c16696.45,10549.19) 16699.97,10545.64 v1(16708.15,10553.82)
I2S3_CK: IC2.111 R155.1 | length 1390
  Top Layer 1 w5: IC2.111@15435.03,11307.38 15435.03,11435.49 v1(15436.4,11436.87)
  Layer 3 w5: v1(15436.4,11436.87) 15467.59,11468.06 15473.28,11468.06 15502.98,11497.75 15542.75,11497.75 15699.83,11654.83 15699.83,12040.21 15776.16,12116.54 16063.46,12116.54 16086.6,12093.4 16124.55,12093.4 v1(16139.66,12108.51)
  Bottom 6+gnd w5: v1@16140,12111.13 R155.1@16140,12144.72
I2S3_MCK: IC2.97 R156.1 | length 1560.2
  Top Layer 1 w5: IC2.97@15552.67,11012.58 15553.37,11011.88 15586.27,11011.88 15602.28,10995.87 15602.28,10981.66 v1(15602.13,10981.51)
  Layer 2 w5: v1(15924.63,12009.63) 16074.63,12009.63 16095.76,12030.76 v1(16095.76,12110.37)
  Layer 3 w5: v1(15602.13,10981.51) 15651.51,10981.51 15735,11065 15735,11440 15930,11635 15930,12001.34 15924.63,12006.72 v1(15924.63,12009.63)
  Bottom 6+gnd w5: R156.1@16095,12144.72 16095,12111.13 v1(16095.76,12110.37)
I2S3_SDI: IC2.112 R152.1 | length 1530.5
  Top Layer 1 w5: IC2.112@15415.34,11307.38 v1@15415.34,11407.01
  Layer 3 w5: v1(15417.61,11412.18) 15418.29,11411.5 15474.35,11411.5 15522.13,11459.28 15551.09,11459.28 15730,11638.19 15730,12027.95 15788.58,12086.54 16050.18,12086.54 16076.72,12060 16145.52,12060 16158.65,12073.13 16184.02,12073.13 16205.51,12094.63 16236.37,12094.63 16251.74,12110 v1(16275,12110)
  Bottom 6+gnd w5: v1@16275,12109.16 v1(16275,12110) R152.1@16275,12142.76
I2S3_SDO: IC2.113 R153.1 | length 1531.6
  Top Layer 1 w5: IC2.113@15395.66,11307.38 15395.66,11426.99 15398.26,11429.6 v1(15398.26,11432.51)
  Layer 3 w5: v1(15398.26,11432.51) 15419.03,11432.51 15430.04,11421.5 15442.77,11421.5 15446.92,11425.65 15474.35,11425.65 15517.99,11469.28 15546.95,11469.28 15720,11642.33 15720,12032.09 15784.44,12096.54 16054.32,12096.54 16080.86,12070 16141.38,12070 16154.51,12083.13 16179.88,12083.13 16206.74,12110 v1(16230,12110)
  Bottom 6+gnd w5: v1@16230,12109.16 R153.1@16230,12142.76
I2S3_WS: IC2.110 R154.1 | length 1417.7
  Top Layer 1 w5: IC2.110@15454.71,11307.38 15454.71,11425.01 15468.52,11438.82 v1(15468.52,11441.56)
  Layer 3 w5: v1(15468.52,11441.56) 15510.05,11483.08 15546.37,11483.08 15709.83,11646.54 15709.83,12036.07 15780.3,12106.54 16058.46,12106.54 16084.32,12080.68 16135.68,12080.68 16146.03,12091.03 16146.03,12093.13 16162.89,12110 v1(16185,12110)
  Bottom 6+gnd w5: v1@16185,12111.13 R154.1@16185,12144.72
I2S_CKIN: IC2.99 R148.1 | length 3197.6
  Top Layer 1 w5: v1(15496.1,11053.05) 15497.2,11051.95 IC2.99@15552.67,11051.95
  Unused w5: v1(15496.1,11053.05) 15062.17,11053.05 cw(c15062.17,11058.05) 15058.65,11054.5 14864.6,11248.55 cw(c14868.15,11252.07) 14863.15,11252.07 14863.15,11256 cw(c14868.15,11256) 14864.6,11259.52 14978.2,11373.12 cw(c14981.72,11369.57) 14981.72,11374.57 15027.18,11374.57 cw(c15027.18,11369.57) 15030.7,11373.12 15035.18,11368.64 ccw(c15038.7,11372.19) 15038.7,11367.19 15106.55,11367.19 ccw(c15106.55,11372.19) 15110.07,11368.64 15164.98,11423.55 cw(c15168.5,11420) 15168.5,11425 15305.4,11425 cw(c15305.4,11420) 15308.92,11423.56 15367.88,11365.27 ccw(c15371.4,11368.82) 15371.4,11363.82 15948.18,11363.82 ccw(c15948.18,11368.82) 15951.7,11365.27 16054.98,11468.55 cw(c16058.5,11465) 16058.5,11470 16343.79,11470 ccw(c16343.79,11475) 16347.31,11471.45 16513.55,11637.69 ccw(c16510,11641.21) 16515,11641.21 16515,12049.67 ccw(c16510,12049.67) 16513.55,12053.19 16492.82,12073.92 ccw(c16489.3,12070.37) 16489.3,12075.37 16478.81,12075.37 cw(c16478.81,12080.37) 16475.27,12076.84 16471.59,12080.53 ccw(c16468.05,12076.99) 16468.05,12081.99 16453.91,12081.99 cw(c16453.91,12086.99) 16451.44,12082.64 v1(16444.12,12086.8)
  Bottom 6+gnd w5: v1(16444.12,12086.8) 16444.12,12143.85 R148.1@16445,12144.72
LATCH: IC14.18 IC15.1 IC16.1 IC17.1 | length 2111.7
  Top Layer 1 w8: IC14.18@19195.67,10782.79 19195.83,10782.95 v1(19245,10782.95) ; IC17.1@20300,10211.53 20301.03,10212.56 v1(20301.03,10266.03) ; IC16.1@20300,10591.53 v1(20300,10646.1) ; IC15.1@20300,10959.25 v1(20300,11013.82)
  Unused w5: v1(19245,10782.95) ccw(c19246.25,10787.79) 19246.25,10782.79 19395.91,10782.79 ccw(c19395.91,10787.79) 19399.43,10784.24 19534.42,10919.23 cw(c19537.94,10915.68) 19537.94,10920.68 20204.79,10920.68 ccw(c20204.79,10925.68) 20208.31,10922.13 v1(20300,11013.82)
  Layer 3 w8: v1(20300,11013.82) v1(20300,10646.1) 20300,10267.05 v1(20301.03,10266.03)
LCD_RESET: H3.41 IC1.96 R46.1 | length 5533.7
  Top Layer 1 w5: v1(15849.86,10112.2) 16016.16,10048.51 ccw(c16025.24,10072.2) 16025.24,10046.83 16690.24,10046.83 ccw(c16690.24,10072.2) 16691.52,10046.86 16842.71,10054.68 ccw(c16841.4,10080.02) 16853.86,10057.92 16875.62,10070.19 v1(16888.98,10082.13) ; v1(16713.15,11018.82) 16734.88,10997.09 IC1.96@16860.91,10997.09 ; v1(17828.57,11286.98) 17863.57,11251.98 R46.1@17908.57,11251.98
  Unused w5: v1(16913.4,10223.87) 17645.27,10461.81 cw(c17710.04,10262.58) 17645.42,10461.86 17859.75,10531.36 ccw(c17855.01,10545.99) 17867.8,10554.52 17828.74,10613.37 ccw(c17824.59,10610.58) 17828.13,10614.11 17824.11,10618.13 cw(c17834.98,10629) 17821.63,10621.38 17810.36,10641.12 cw(c17823.72,10648.74) 17808.35,10649.23 v1(17828.57,11286.98)
  Layer 3 w5: v1(15849.86,10112.2) 15850.24,10112.58 15850.24,10481.35 15834.82,10496.76 15834.82,10521.79 15890.24,10577.2 15890.24,10995.18 15889.31,10996.1 15889.31,10996.39 15889.31,10997.98 15888.39,10999.28 15877.33,11014.87 cw(c15889.86,11023.77) 15874.49,11023.77 15874.49,11052.2 cw(c15889.86,11052.2) 15875.29,11057.11 15952.21,11286.6 cw(c15995.24,11272.2) 15963.09,11304.22 15966.96,11308.1 cw(c15991.64,11283.28) 15991.64,11318.28 16568.3,11318.28 16707.74,11178.84 16707.74,11041.1 16713.15,11035.69 v1(16713.15,11018.82) ; v1(16888.98,10082.13) 16913.15,10106.29 16913.15,10223.62 v1(16913.4,10223.87)
  Bottom 6+gnd w5: H3.41@17753.15,11258.46 17801.83,11261.87 17808.28,11265.87 ccw(c17804.33,11272.25) 17809.78,11267.1 v1(17828.57,11286.98)
LCD_TE: IC1.48 R137.2 | length 2185.9
  Top Layer 1 w5: v1(16298.15,10343.82) 16310.2,10355.87 IC1.48@16310.2,10466.06
  Unused w5: v1(16298.15,10343.82) 16299.19,10320.13 cw(c16294.19,10319.93) 16297.75,10316.41 16285.07,10303.73 ccw(c16288.62,10300.21) 16283.62,10300.21 16283.62,10287.76 ccw(c16288.62,10287.76) 16285.12,10284.19 16326.57,10242.74 ccw(c16330.09,10246.29) 16328.48,10241.56 16482.28,10190.29 ccw(c16483.89,10195.02) 16484.01,10190.02 16818.46,10199.58 ccw(c16818.14,10210.64) 16825.93,10202.78 16862.33,10239.18 cw(c16865.85,10235.63) 16864.26,10240.37 v1(17553.15,10470)
  Bottom 6+gnd w5: v1(17553.15,10470) 17553.15,10350 17603.15,10300 17793.15,10300 17948.43,10455.28 R137.2@17948.43,10500
LDQM1_7: IC2.141 R9.2 U3.15 U4.15 | length 2842.9
  Top Layer 1 w5: IC2.141@14844.42,11307.38 14844.68,11307.12 14844.68,11254.74 v1(14844.89,11254.54) ; R9.2@15023.73,9660.61 15023.67,9662.58 15053.61,9692.53 15070.34,9692.53 v1(15088.11,9710.3) ; v1@15088.35,10170.19 U3.15@15088.35,10232.03
  Layer 3 w5: v1(14844.89,11254.54) 14844.76,11254.54 14699.86,11109.64 14699.85,11090.81 14699.82,10533.22 cw(c14694.82,10533.25) 14698.62,10530 14656.6,10480.75 ccw(c14698.42,10445.04) 14644.72,10456.9 14644.22,10454.64 ccw(c14678.4,10447.09) 14643.4,10447.14 14643.4,10444.91 14644.9,9709.3 14644.9,9709.17 ccw(c14710.27,9709.43) 14710.04,9644.05 14741.5,9643.94 ccw(c14741.61,9673.94) 14741.61,9643.94 14867.78,9643.94 14930.81,9644.1 ccw(c14930.63,9709.47) 14951.09,9647.38 14979.44,9656.72 ccw(c14962.12,9709.31) 14980.57,9657.1 15040.59,9678.3 ccw(c15035.6,9692.45) 15043.77,9679.87 15085.83,9707.19 ccw(c15083.11,9711.38) 15087.66,9709.31 v1(15088.11,9710.3) v1(15088.11,10169.94)
  Bottom 6+gnd w5: v1@15088.35,9709.56 U4.15@15088.35,9771.4
LDQM_6: IC1.141 R7.2 U1.15 U2.15 | length 3172.6
  Top Layer 1 w5: v1(16150.43,11235.1) 16151.57,11236.24 16151.57,11310.43 IC1.141@16152.72,11311.57 ; R7.2@16331.97,9663.82 16331.97,9665.79 16361.91,9695.73 16378.64,9695.73 v1(16396.41,9713.5) ; v1(16396.41,10174.13) U1.15@16396.41,10235.97 ; v1@16396.65,10174.38 U1.15@16396.65,10236.22
  Layer 3 w5: 16005.66,11170.57 16091.63,11241.21 ; 16005.66,11170.58 ccw(c16008.83,11166.71) 16003.83,11166.71 16003.83,10533.17 15953.16,10482.5 ccw(c15956.7,10478.97) 15951.7,10478.97 15951.7,10450.26 15953.2,9713.46 ccw(c16018.57,9713.62) 16018.32,9648.24 16049.71,9648.13 16284.62,9647.93 ; v1(16150.43,11235.1) 16104.43,11244.4 ; 16284.63,9647.93 16328.77,9647.93 ccw(c16328.77,9652.93) 16332.3,9649.4 v1(16396.41,9713.5) v1(16396.41,10174.13) ; 16091.63,11241.21 cw(c16101.39,11229.33) 16104.43,11244.4 ; 16091.63,11241.21 cw(c16101.39,11229.33) 16104.43,11244.4 ; 16091.63,11241.21 cw(c16101.39,11229.33) 16104.43,11244.4 ; 16091.63,11241.21 cw(c16101.39,11229.33) 16104.43,11244.4 ; 16091.63,11241.21 cw(c16101.39,11229.33) 16104.43,11244.4 ; 16091.63,11241.21 cw(c16101.39,11229.33) 16104.43,11244.4 ; 16091.63,11241.21 cw(c16101.39,11229.33) 16104.43,11244.4 ; 16091.63,11241.21 cw(c16101.39,11229.33) 16104.43,11244.4 ; 16091.63,11241.21 cw(c16101.39,11229.33) 16104.43,11244.4 ; 16091.63,11241.21 cw(c16101.39,11229.33) 16104.43,11244.4 ; 16091.63,11241.21 cw(c16101.39,11229.33) 16104.43,11244.4 ; 16091.63,11241.21 cw(c16101.39,11229.33) 16104.43,11244.4 ; 16091.63,11241.21 cw(c16101.39,11229.33) 16104.43,11244.4 ; 16091.63,11241.21 cw(c16101.39,11229.33) 16104.43,11244.4 ; 16091.63,11241.21 cw(c16101.39,11229.33) 16104.43,11244.4 ; 16091.63,11241.21 cw(c16101.39,11229.33) 16104.43,11244.4
  Bottom 6+gnd w5: v1@16396.65,9713.75 U2.15@16396.65,9775.59
LED_REAR: IC1.110 R138.2 | length 3419.4
  Top Layer 1 w5: IC1.110@16762.95,11311.57 16762.95,11279.49 v1(16785.24,11257.2)
  Top Layer 1 w8: R138.2@18515.28,13140 v1(18555,13140)
  Layer 3 w5: v1(16785.24,11257.2) 16785.24,11306.23 16836.29,11357.28 16859.6,11357.28 17422.32,11920 18460,11920 18610,12070 18610,12545 18515,12640 18515,13100 v1(18555,13140)
MISO: IC14.5 IC15.9 | length 1983.9
  Top Layer 1 w8: IC14.5@18964.33,10731.61 19016.61,10731.61 19054.03,10769.03 v1(19054.03,10769.37) ; IC15.9@20650,11173.82 v1(20650,11230)
  Unused w5: v1(19054.03,10769.37) 19143.21,10858.55 cw(c19146.73,10855) 19146.73,10860 19262.44,10860 cw(c19262.44,10855) 19265.95,10858.56 19308.55,10816.45 ccw(c19312.07,10820) 19312.07,10815 19405.73,10815 ccw(c19405.73,10820) 19409.25,10816.45 19528.75,10935.95 cw(c19532.27,10932.4) 19532.27,10937.4 20190.33,10937.4 ccw(c20190.33,10942.4) 20193.85,10938.85 20288.55,11033.55 cw(c20292.07,11030) 20292.07,11035 20452.93,11035 ccw(c20452.93,11040) 20456.45,11036.45 v1(20650,11230)
MOSI: IC14.16
NetC1_1: C1.1 IC1.106 | length 127.8
  Top Layer 1 w5: IC1.106@16860.91,11193.94 16919.98,11193.94 16925.55,11199.51 16975.33,11199.51 C1.1@16983.15,11207.32
NetC2_1: C2.1 IC2.106 | length 127.8
  Top Layer 1 w5: IC2.106@15552.67,11189.75 15661.52,11189.75 C2.1@15674.91,11203.13
NetC3_2: C3.2 IC1.23 Y1.1 | length 277.5
  Top Layer 1 w5: C3.2@15861.65,10923.82 15861.65,10837.13 Y1.1@15856.65,10832.13 15856.65,10828.19 15896.02,10788.82 15943.15,10788.82 15954.57,10800.24 IC1.23@16015.39,10800.24
NetC4_2: C4.2 IC2.23 Y2.1 | length 277.5
  Top Layer 1 w5: C4.2@14553.41,10919.63 14553.41,10832.94 Y2.1@14548.41,10827.94 14548.41,10824 14587.78,10784.63 14634.91,10784.63 14646.33,10796.05 IC2.23@14707.15,10796.05
NetC5_2: C5.2 IC1.24 Y1.3 | length 204.3
  Top Layer 1 w5: C5.2@15919.65,10653.82 Y1.3@15919.65,10745.51 15919.65,10749.45 15940.77,10770.57 15944.71,10770.57 15954.69,10780.55 IC1.24@16015.39,10780.55
NetC6_2: C6.2 IC2.24 Y2.3 | length 204.3
  Top Layer 1 w5: C6.2@14611.41,10649.63 Y2.3@14611.41,10741.32 14611.41,10745.26 14632.53,10766.38 14636.46,10766.38 14646.44,10776.36 IC2.24@14707.15,10776.36
NetC9_2: C9.2 IC1.71 | length 135.2
  Top Layer 1 w5: IC1.71@16763.15,10466.26 IC1.71@16762.95,10466.06 16762.95,10414.01 16773.15,10403.82 C9.2@16841.65,10403.82
NetC10_2: C10.2 IC2.71 | length 135
  Top Layer 1 w5: IC2.71@15454.71,10461.87 15454.71,10409.83 15464.91,10399.63 C10.2@15533.41,10399.63
NetC67_2: C67.2 IC1.8 Y3.2 | length 296.6
  Top Layer 1 w5: Y3.2@15843.9,11052.67 15843.9,11134.44 C67.2@15854.13,11144.66 ; Y3.2@15847.02,11050.2 15847.49,11049.74 v1(15892.98,11049.74) ; v1(15956.45,11112.31) 15958.4,11110.36 15966.24,11110.36 15981.08,11095.51 IC1.8@16015.39,11095.51
  Bottom 6+gnd w5: v1@15893.98,11049.74 v1@15956.45,11112.21
NetC68_2: C68.2 IC1.9 Y3.1 | length 182.6
  Top Layer 1 w5: C68.2@15929.56,11145 15929.56,11065.43 15942.33,11052.67 15942.33,11056.67 15961.48,11075.83 IC1.9@16015.39,11075.83
NetC92_2: C92.2 D2.2 IC20.3 R18.2 | length 164
  Top Layer 1 w10: D2.2@20183.35,12762.1 20189.26,12762.1 20226.58,12724.78 20226.58,12723.54 20298.15,12651.97 C92.2@20298.15,12650
  Top Layer 1 w25: R18.2@20304.65,13020 R18.2@20304.96,13019.68 ; IC20.3@20304.96,12915.32 IC20.3@20305.28,12915
NetC93_2: C93.2 C94.2 IC23.8 R53.2 | length 210
  Top Layer 1 w20: R53.2@20724.65,12780 C94.2@20794.65,12780
  Top Layer 1 w40: C94.2@20794.65,12780 C93.2@20794.65,12860 20794.65,12920
NetC95_2: C95.2 R53.1 | length 68.8
  Top Layer 1 w20: C95.2@20604.65,12780 R53.1@20673.46,12780
NetC96_2: C96.2 IC23.5 R125.1 | length 154.9
  Top Layer 1 w10: R125.1@20720.24,13170 20784.65,13170 C96.2@20794.65,13160 20797.87,13156.77 IC23.5@20797.87,13085
NetD1_1: D1.1 R1.7 U6.2 | length 909.1
  Top Layer 1 w10: R1.7@15436.54,12319.25 v1(15402.68,12319.25) 15373.74,12319.25 D1.1@15365,12327.99 15365,12358.79 15350,12373.79 15350,12408.77 15331.1,12427.67 15331.1,12475.9 15345.09,12489.89 15389.95,12489.89 15421.02,12458.82 15727.4,12458.82 15786.21,12400 U6.2@15960.04,12400
NetD1_2: D1.2 R1.6 U6.1 | length 813.7
  Top Layer 1 w10: R1.6@15436.54,12350.75 15394.25,12350.75 15365,12380 15365,12442.03 D1.2@15365,12452.01 15375.76,12441.24 15723.76,12441.24 15865,12300 U6.1@15960.04,12300
NetD3_1: D3.1 IC21.1 L1.2 | length 252.7
  Top Layer 1 w25: L1.2@19410.79,13044.99 19410.79,12974.01 19469.03,12915.77 ; 19469.03,12909.99 19469.03,12915.77 ; IC21.1@19516.38,12841.81 19516.38,12868.42 19469.03,12915.77
NetD4_1: D4.1 R132.1 | length 60.6
  Top Layer 1 w5: D4.1@19918.66,13200 19920,13198.66 R132.1@19920,13140
NetD5_1: D5.1 R138.1 | length 60
  Top Layer 1 w8: R138.1@18470,13140 D5.1@18470,13200
NetFB1_1: FB1.1 JK1.5 | length 161.3
  Top Layer 1 w10: FB1.1@15524.8,12555 15524.8,12556.97 15545.39,12577.56 15547.36,12577.56 15628.93,12659.13 JK1.5@15628.93,12672
NetFB1_2: FB1.2 R1.5 | length 243.3
  Top Layer 1 w8: FB1.2@15461.89,12554.92 15463.26,12553.55 15463.26,12514.65 v1(15464.06,12513.85)
  Top Layer 1 w10: v1(15396.46,12383.62) 15397.26,12382.82 15435.96,12382.82 R1.5@15436.54,12382.24
  Layer 3 w10: v1(15396.46,12383.62) 15398.01,12383.62 15400.89,12386.49 15402.24,12386.49 15464.06,12448.31 v1(15464.06,12513.85) v1@15463.5,12514.41
NetFB2_1: FB2.1 JK1.4 | length 158.1
  Top Layer 1 w10: JK1.4@15228.93,12672 15228.93,12651.38 15302.76,12577.56 15304.72,12577.56 15325.31,12556.97 FB2.1@15325.31,12555
NetFB2_2: FB2.2 R1.8 | length 327.1
  Top Layer 1 w8: v1(15387.76,12287.76) R1.8@15436.54,12287.76 ; FB2.2@15388.31,12555 15388.31,12516.66 15389.96,12515 v1(15389.96,12512.9)
  Layer 3 w8: v1(15387.76,12287.76) 15387.76,12310.31 15376.38,12321.69 15376.38,12476.79 15390,12490.41 v1(15389.96,12512.9)
NetFB3_1: FB3.1 R102.2 | length 65
  Top Layer 1 w10: R102.2@15406.2,12107.11 FB3.1@15471.2,12107.11
NetFB3_2: FB3.2 JK2.4 | length 1009.4
  Top Layer 1 w10: FB3.2@15534.19,12107.11 15820.56,12107.11 v1(15859.46,12068.2)
  Unused w8: v1(15859.46,12068.2) 15859.46,12201.15 cw(c15867.46,12201.15) 15861.8,12206.8 16023.6,12368.6 ccw(c16017.93,12374.24) 16025.93,12374.24 JK2.4@16025.93,12668
NetFB4_1: FB4.1 R104.2 | length 65
  Top Layer 1 w10: R104.2@15406.2,12177.11 FB4.1@15471.2,12177.11
NetFB4_2: FB4.2 JK2.5 | length 1255.4
  Top Layer 1 w10: FB4.2@15534.19,12177.11 15539.6,12171.7 15578.34,12171.7 15623.74,12126.3 15828.7,12126.3 15882.53,12072.47 15882.53,12072.14 15885.4,12069.27 v1(15885.4,12067.71)
  Unused w8: v1(15885.4,12067.71) cw(c15893,12070.22) 15885,12070.22 15885,12182.43 cw(c15893,12182.43) 15887.34,12188.08 16051.92,12352.66 cw(c16057.57,12347) 16057.57,12355 16109.62,12355 ccw(c16109.62,12363) 16115.27,12357.34 JK2.5@16425.93,12668
NetFB5_1: FB5.1 R105.2 | length 79.9
  Top Layer 1 w10: R105.2@15687.38,11952.31 15693.52,11958.45 15693.52,12004.63 FB5.1@15711.2,12022.31
NetFB5_2: FB5.2 JK3.4 | length 1446.9
  Top Layer 1 w5: FB5.2@15771.31,12025.19 FB5.2@15774.19,12022.31
  Top Layer 1 w10: FB5.2@15774.19,12022.31 15784.01,12032.12 15784.01,12059.01 v1(15795,12070)
  Unused w8: v1(15795,12070) 15822.62,12042.38 ccw(c15828.31,12048) 15828.31,12040 15916.96,12040 ccw(c15916.96,12048) 15922.61,12042.34 15930.54,12050.26 ccw(c15924.87,12055.91) 15932.87,12055.91 15932.87,12194.56 cw(c15940.87,12194.56) 15935.21,12200.21 16052.66,12317.66 cw(c16058.31,12312) 16058.31,12320 16474.62,12320 ccw(c16474.62,12328) 16480.27,12322.34 JK3.4@16825.93,12668
NetFB6_1: FB6.1 R140.2 | length 60.1
  Top Layer 1 w10: R140.2@15120,12126.54 15179.72,12126.54 FB6.1@15180,12126.81
NetFB6_2: FB6.2 JK3.5 | length 2416.3
  Top Layer 1 w10: FB6.2@15180,12189.8 15181.97,12189.8 15202.56,12210.39 15202.56,12212.36 15217.37,12227.17 15220.52,12227.17 v1(15221.62,12228.27) ; JK3.5@17225,12667.07 JK3.5@17225.93,12668
  Unused w5: v1(17225.36,12377.26) 17225.36,12665.72 cw(c17230.36,12665.69) JK3.5@17225.93,12668
  Layer 3 w10: v1(15221.62,12228.27) 15418.27,12228.27 15520,12330 16745,12330 16792.26,12377.26 v1(17225.36,12377.26)
NetH2_5: H2.5 R135.2 | length 120.2
  Top Layer 1 w5: H2.5@19749.81,12770 R135.2@19870,12770
NetH2_6: H2.6 R136.2 | length 120.2
  Top Layer 1 w5: H2.6@19749.81,12670 R136.2@19870,12670
NetH3_12: H3.12 R137.1 | length 306.1
  Bottom 6+gnd w5: H3.12@17753.15,10687.6 17801.83,10684.19 17833.17,10682.18 cw(c17832.19,10666.84) 17847.52,10667.98 17850.32,10630.14 cw(c17834.98,10629) 17850.22,10626.99 17839.77,10548.01 ccw(c17855.01,10545.99) 17846.48,10533.2 17865.53,10520.5 ccw(c17871.08,10528.82) 17867.09,10519.65 17890.89,10509.31 R137.1@17903.15,10500
NetH3_13: H3.13 R40.1 | length 238.9
  Bottom 6+gnd w5: H3.13@17753.15,10707.28 17801.83,10703.88 17840.31,10690.88 cw(c17832.19,10666.84) 17856.57,10673.86 17881.18,10588.3 ccw(c17888.39,10590.38) 17881.81,10586.78 17890.89,10570.19 R40.1@17903.15,10560.87
NetH3_14: H3.14 R41.1 | length 215.9
  Bottom 6+gnd w5: H3.14@17753.15,10726.97 17801.83,10723.56 17849.06,10697.93 cw(c17832.19,10666.84) 17865.89,10677.58 17881.24,10629.42 ccw(c17888.39,10631.69) 17881.81,10628.09 17890.89,10611.5 R41.1@17903.15,10602.19
NetH3_15: H3.15 R54.1 | length 194.2
  Bottom 6+gnd w5: H3.15@17753.15,10746.65 17801.83,10743.25 17808.28,10739.25 cw(c17804.33,10732.87) 17808.66,10739 17858.36,10703.91 cw(c17832.19,10666.84) 17872.61,10687.44 17881.7,10669.6 ccw(c17888.39,10673.01) 17881.81,10669.41 17890.89,10652.82 R54.1@17903.15,10643.5
NetH3_16: H3.16 R55.1 | length 182.8
  Bottom 6+gnd w5: H3.16@17753.15,10766.34 17816.61,10766.34 cw(c17816.61,10761.34) 17820.13,10764.89 17890.89,10694.13 R55.1@17903.15,10684.82
NetH3_19: H3.19 R56.1 | length 188.6
  Bottom 6+gnd w5: H3.19@17753.15,10825.39 17801.83,10821.99 17808.28,10817.99 cw(c17804.33,10811.61) 17809.64,10816.91 17890.89,10735.45 R56.1@17903.15,10726.14
NetH3_20: H3.20 R57.1 | length 181.2
  Bottom 6+gnd w5: H3.20@17753.15,10845.08 17820.5,10845.08 cw(c17820.5,10840.08) 17824.02,10843.63 17890.89,10776.76 R57.1@17903.15,10767.45
NetH3_21: H3.21 R58.1 | length 166.3
  Bottom 6+gnd w5: H3.21@17753.15,10864.76 17813.44,10864.76 cw(c17813.44,10859.76) 17816.06,10864.03 17890.89,10818.08 R58.1@17903.15,10808.77
NetH3_22: H3.22 R59.1 | length 157.9
  Bottom 6+gnd w5: H3.22@17753.15,10884.45 17827.11,10884.45 cw(c17827.11,10879.45) 17828.94,10884.1 17890.89,10859.4 R59.1@17903.15,10850.08
NetH3_23: H3.23 R60.1 | length 153.2
  Bottom 6+gnd w5: H3.23@17753.15,10904.13 17837.92,10904.13 cw(c17837.92,10899.13) 17838.21,10904.13 17890.89,10900.71 R60.1@17903.15,10891.4
NetH3_24: H3.24 R61.1 | length 152.9
  Bottom 6+gnd w5: H3.24@17753.15,10923.82 17890.89,10923.82 R61.1@17903.15,10932.71
NetH3_25: H3.25 R62.1 | length 156.7
  Bottom 6+gnd w5: H3.25@17753.15,10943.5 17829.02,10943.5 ; 17829.06,10943.51 ccw(c17828.99,10948.51) 17830.63,10943.78 17890.89,10964.72 R62.1@17903.15,10974.03
NetH3_26: H3.26 R63.1 | length 165.1
  Bottom 6+gnd w5: H3.26@17753.15,10963.19 17819.13,10963.19 ccw(c17819.1,10968.19) 17821.7,10963.92 17890.89,11006.04 R63.1@17903.15,11015.35
NetH3_27: H3.27 R64.1 | length 179.6
  Bottom 6+gnd w5: H3.27@17753.15,10982.87 17824.34,10982.87 ; 17824.37,10982.88 ccw(c17824.31,10987.88) 17827.84,10984.34 17890.89,11047.35 R64.1@17903.15,11056.66
NetH3_28: H3.28 R65.1 | length 185.9
  Bottom 6+gnd w5: H3.28@17753.15,11002.56 17801.83,11005.97 17808.28,11009.96 ccw(c17804.33,11016.34) 17809.51,11010.92 17890.89,11088.67 R65.1@17903.15,11097.98
NetH3_29: H3.29 R66.1 | length 201.8
  Bottom 6+gnd w5: H3.29@17753.15,11022.24 17801.83,11025.65 17808.28,11029.65 ccw(c17804.33,11036.03) 17810.14,11031.28 17890.89,11129.98 R66.1@17903.15,11139.29